# Altium PCB PCB1.PcbDoc
Units mm, origin at the board's own origin, x right, y up, seen from the top; angles counter-clockwise.
Board outline 85.47 x 55.88 mm, 2 copper layers (Top Layer, Bottom Layer); 30 components, 27 nets, 108 pads, 19 vias.
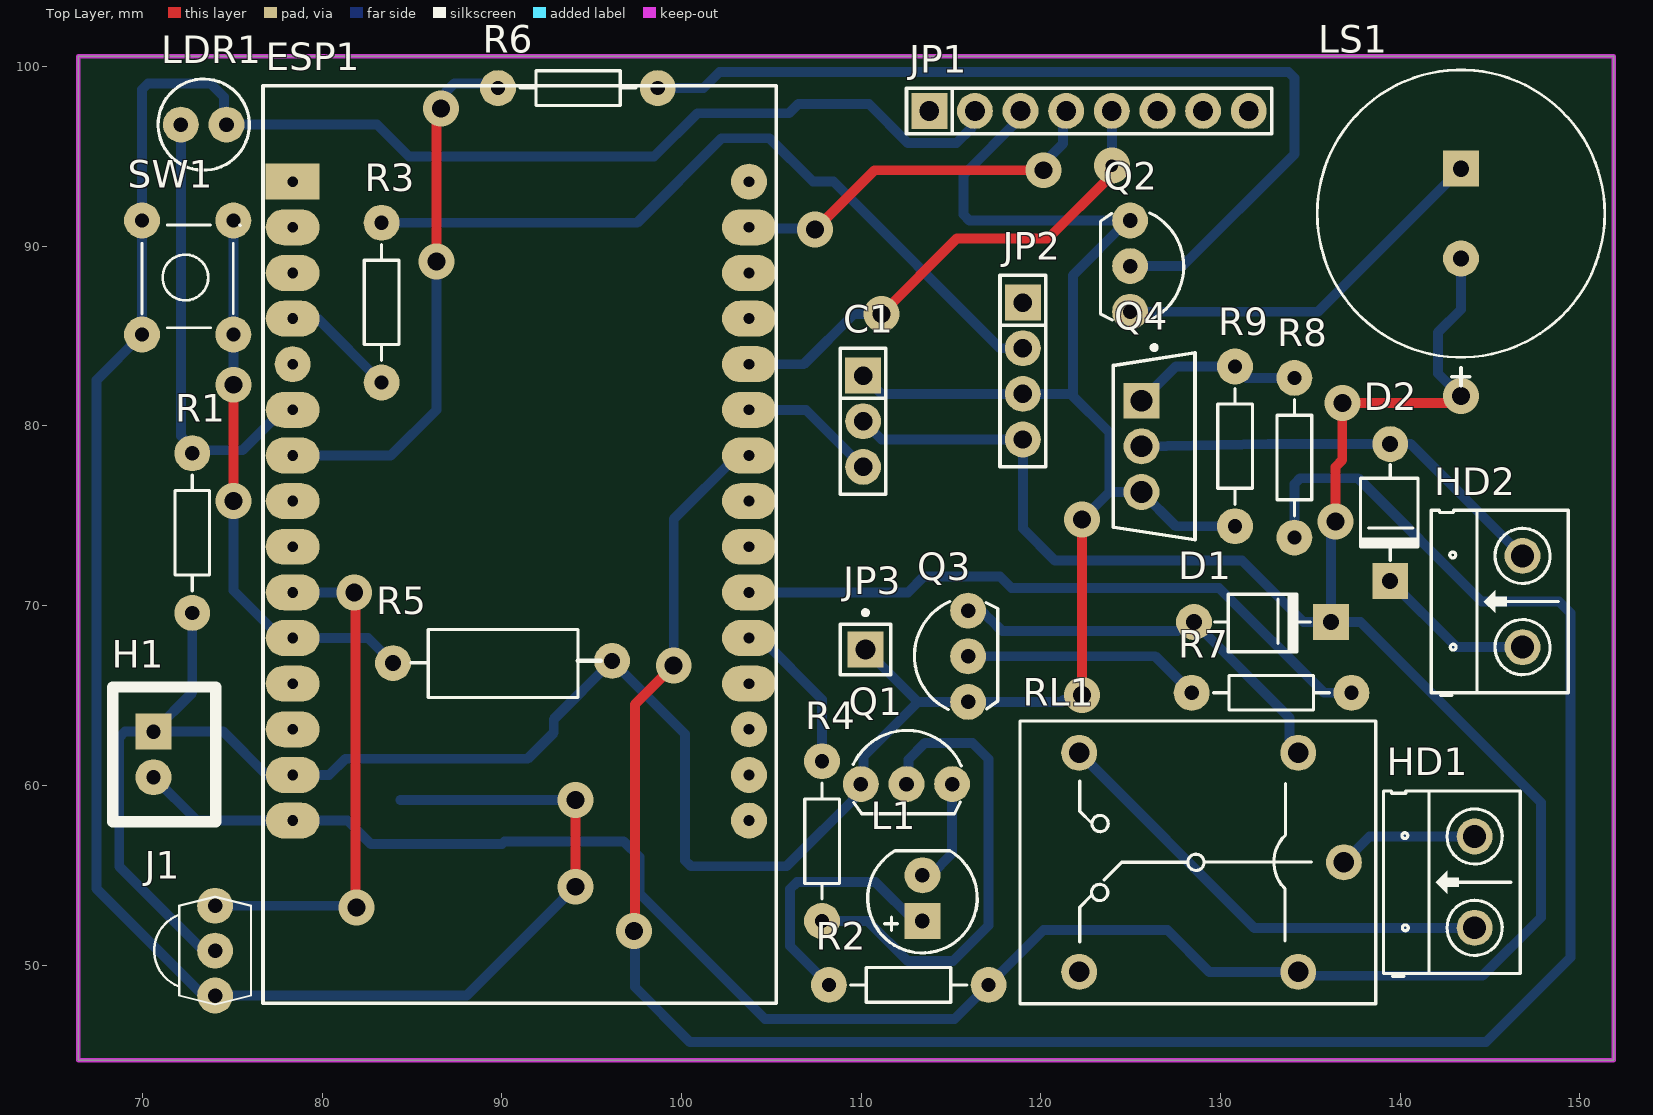
[diagram p0: Top Layer view]
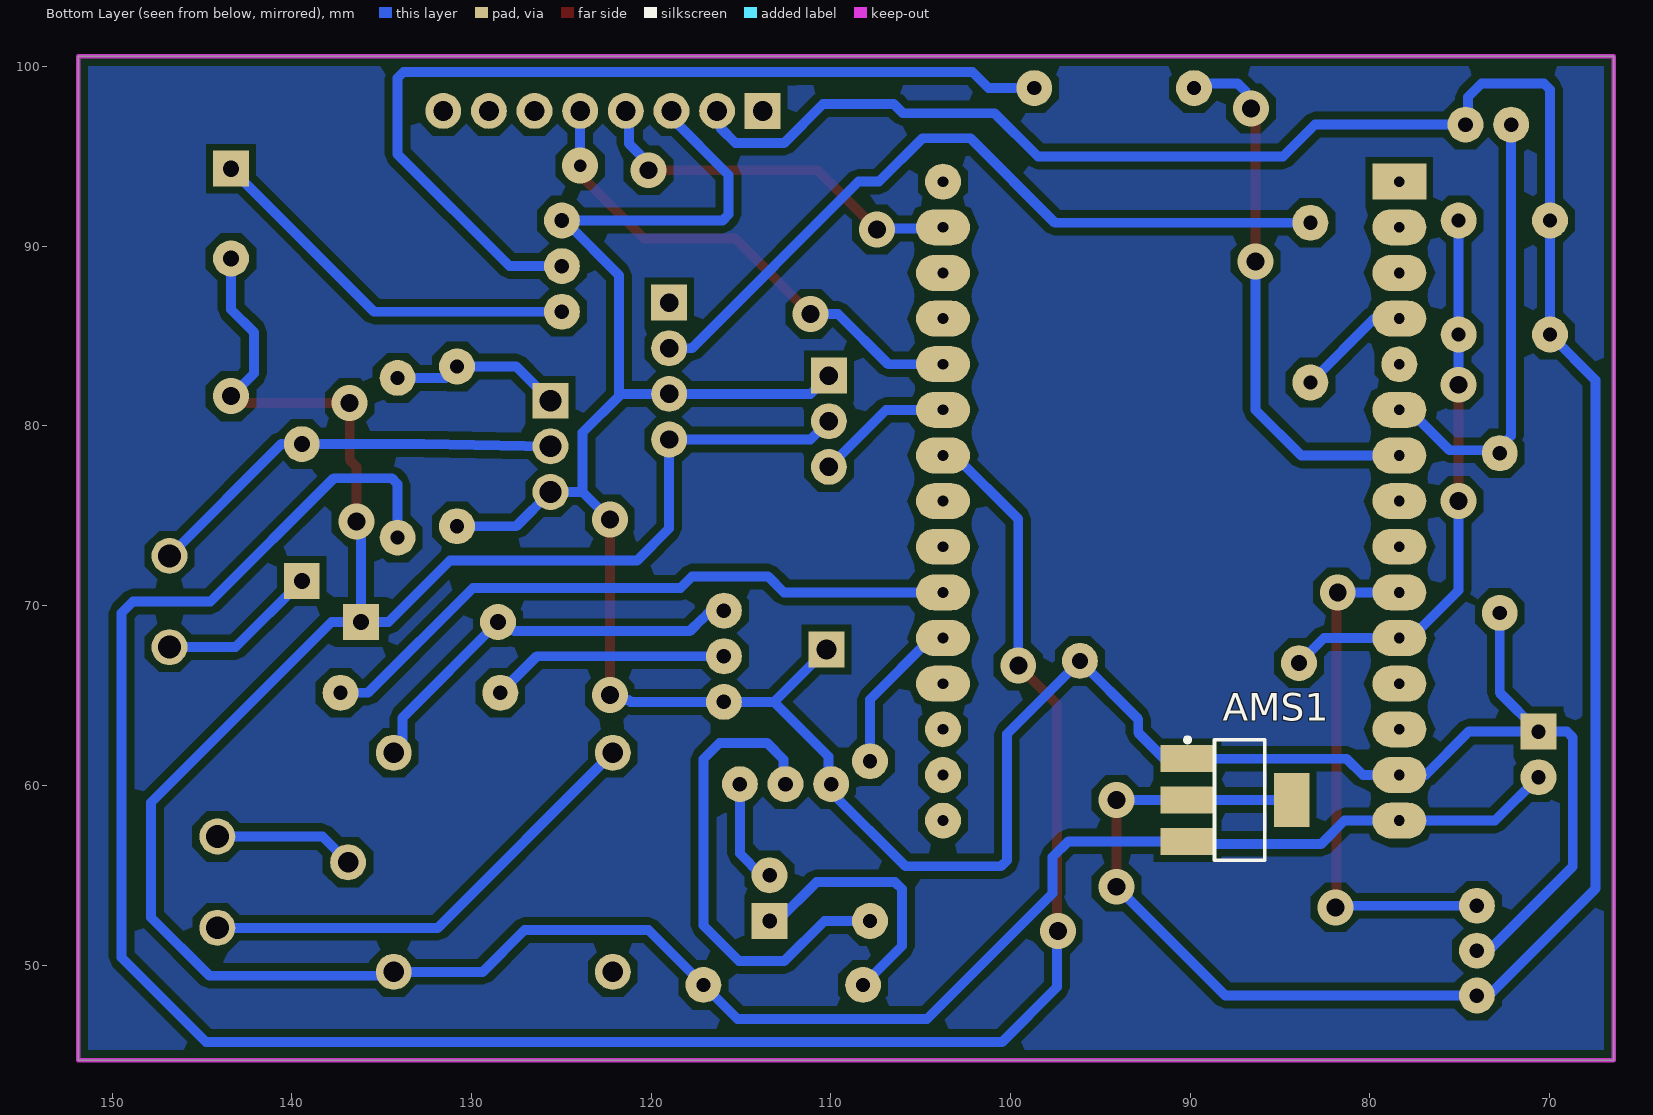
[diagram p1: Bottom Layer view, seen from below]
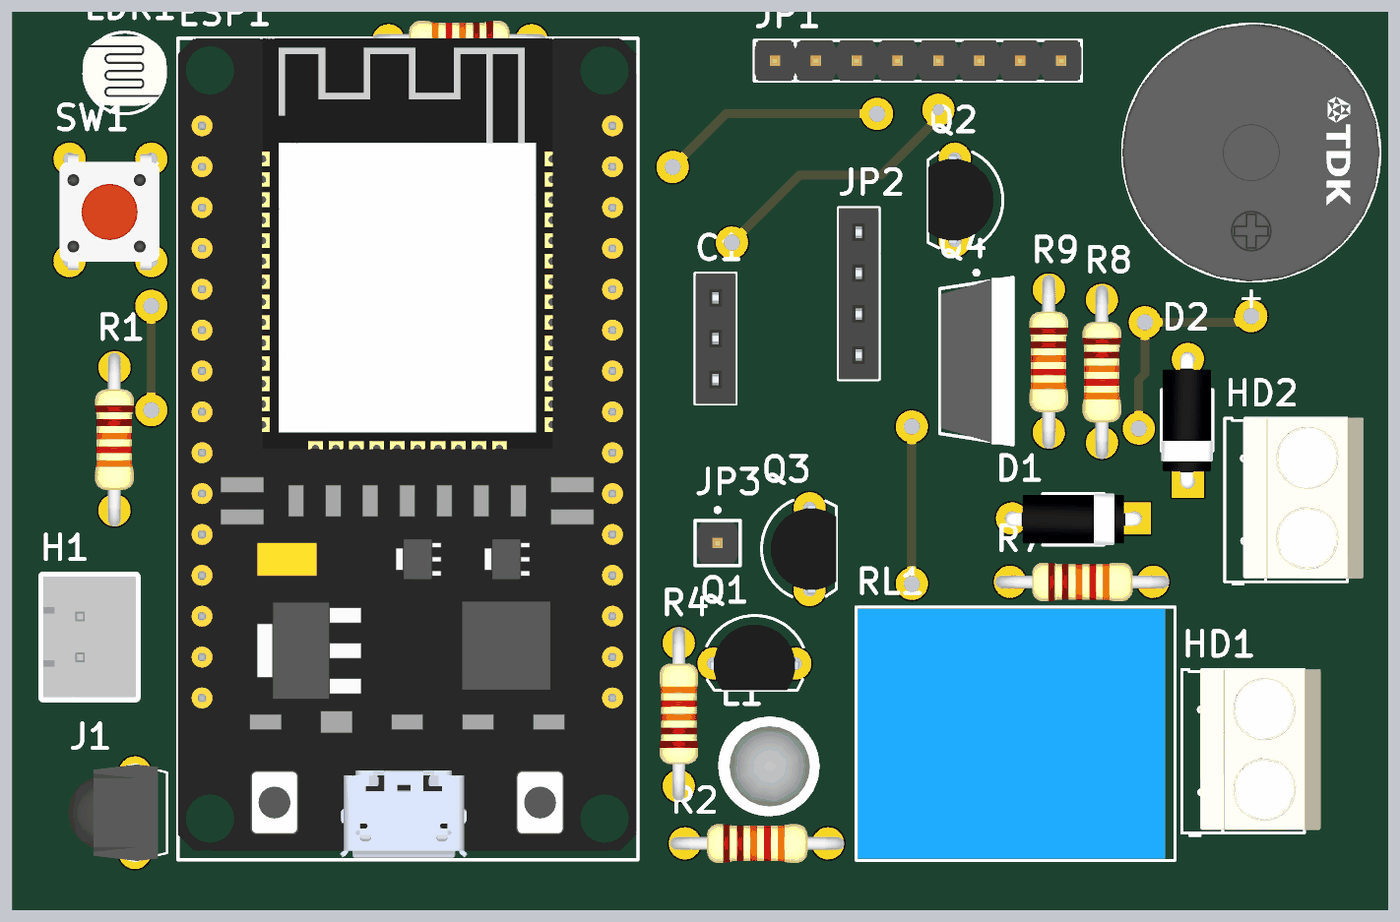
[diagram p2: 3D render of the assembled board from above, using the file's embedded part models]

## Layer stack, top to bottom
Top Solder: solder mask 0.0102, Solder Resist, Dk 3.5
Top Layer: signal copper 0.0356
Dielectric 1: dielectric 0.32, FR-4, Dk 4.8
Bottom Layer: signal copper 0.0356
Bottom Solder: solder mask 0.0102, Solder Resist, Dk 3.5

## Board outline
66.421,44.704 66.421,100.584 151.892,100.584 151.892,44.704

## Design rules (kind name [scope] priority, off if disabled: settings)
Clearance [All] p1: gap=0.4 ignorepadtopadclearanceinfootprint=FALSE
PolygonConnect [All] p1: connectstyle=Relief reliefconductorwidth=0.254 reliefentries=4 polygonreliefangle="90 Angle" airgapwidth=0.254
RoutingVias [All] p1: holewidth=0.711 width=1.27 viastyle="Through Hole" minholewidth=0.711 minwidth=1.27 maxholewidth=0.711 maxwidth=1.27
SolderMaskExpansion [All] p1: expansion=0.102 istentingtop=FALSE
SupplyNets "Schematic Supply Nets_2" [InNet('GND')] p1: voltage=0.000
SupplyNets "Schematic Supply Nets_1" [InNet('+12')] p2: voltage=0.000
SupplyNets "Schematic Supply Nets" [InNet('+5')] p3: voltage=0.000
Width [All] p1: maxlimit=0.6 minlimit=0.5 preferedwidth=0.55
30 further rules are at their usual default settings.

## Components (designator, comment, footprint, x,y, rotation, side; value= is the part's Value field where it differs from the comment)
AMS1 "AMS1117-3.3V" SOT223 87.249,59.182 r270 bottom value="AMS1117-3.3V SOT223"
C1 "JP3" JP3-C1T 110.109,82.804 r270 top
D1 "100v" "DIODE 1A" 127.254,69.088 r180 top
D2 "100v" "DIODE 1A" 139.446,80.264 r90 top
ESP1 "ESP32 DEVKIT" "ESP32 WROOM 32 KIT" 78.359,93.599 r0 top
H1 "Header 2P 2.54" XH2.54M-2 70.612,62.992 r270 top
HD1 "Header 2" HED2 144.145,52.07 r90 top
HD2 "Header 2" HED2 146.812,67.691 r90 top
J1 "IR 1838" "IR 1838" 74.068,50.799 r270 top
JP1 "JP 1x8 2.54" "JP 1x8 DT" 113.792,97.536 r0 top
JP2 "JP 1x4 2.54" "JP 1x4 CT" 118.999,86.868 r270 top
JP3 "JP 1x1 2.54" "JP 1x1 DT" 110.236,67.564 r0 top
L1 "LED 5mm" LED-5MM-WHITE 113.411,53.721 r90 top
LDR1 "LDR" CDS 72.136,96.774 r0 top
LS1 "SD1614T5-A1" FP-SD1614T5-A1-MFG 143.383,91.821 r270 top
Q1 "2N222" TO92-123 112.522,60.071 r0 top value=C1815
Q2 "2N222" TO92-123 124.968,88.9 r270 top value=C1815
Q3 "2N222" TO92-123 115.951,67.183 r90 top value=C1815
Q4 "IRLZ44NPbF" FP-PG-TO220-3-MFG 126.308,78.867 r0 top
R1 "10k" R1/4W 72.771,69.596 r90 top value="R1/4W - 1K"
R2 "47" R1/4W 117.094,48.895 r180 top value="R1/4W - 1K"
R3 "1k" R1/4W 83.312,82.423 r90 top value="R1/4W - 1K"
R4 "220" R1/4W 107.823,61.341 r270 top value="R1/4W - 1K"
R5 "10k" RES-1/2W 90.551,66.802 r180 top
R6 "220" R1/4W 89.789,98.806 r0 top value="R1/4W - 1K"
R7 "220" R1/4W 137.287,65.151 r180 top value="R1/4W - 1K"
R8 "220" R1/4W 134.112,73.787 r90 top value="R1/4W - 1K"
R9 "10k" R1/4W 130.81,74.422 r90 top value="R1/4W - 1K"
RL1 "Relay 10A/12V" "RELAY 5" 128.613,55.715 r180 top value="Relay SPDT, 10A, 12V"
SW1 "SW" SW4 69.977,85.09 r90 top value="Button chip 4 pin"

## Footprints (in the part's own frame and the unit in brackets; to place one, negate y for a bottom-side part, rotate by r counter-clockwise, add the part's x,y. Pads: shape width x height; smd on the part's side, far side on the other; paste and mask are expansions set on the pad)
CDS [mm] "QUANG TRO"
  round 2 hole 0.813: 1(0,0) 2(2.54,0)
  silkscreen extent -1.27,-2.54 3.81,2.54, body extent -1.33,-2.03 3.88,2.27, height 3.51
"DIODE 1A" [mm] "Diode 1A"
  round 2 hole 0.889: 1(-1.27,0)
  rect 2x2 hole 0.889: 2(-8.89,0)
  silkscreen extent -7.75,-1.55 -2.41,1.65, body extent -9.29,-1.55 -0.87,1.65, height 3.1
"ESP32 WROOM 32 KIT" [mm]
  rect 3x2 hole 0.6: 1(0,0)
  oval 3x2 hole 0.6: 2(0,-2.54) 3(0,-5.08) 4(0,-7.62) 6(0,-12.7) 7(0,-15.24) 8(0,-17.78) 9(0,-20.32) 10(0,-22.86) 11(0,-25.4) 12(0,-27.94) 13(0,-30.48) 14(0,-33.02) 15(0,-35.56) 19(25.4,-27.94) 20(25.4,-25.4) 21(25.4,-22.86) 22(25.4,-20.32) 23(25.4,-17.78) 24(25.4,-15.24) 25(25.4,-12.7) 26(25.4,-10.16) 27(25.4,-7.62) 28(25.4,-5.08) 29(25.4,-2.54)
  round 2 hole 0.6: 5(0,-10.16) 16(25.4,-35.56) 17(25.4,-33.02) 18(25.4,-30.48) 30(25.4,0)
  silkscreen extent -1.65,-45.72 26.92,5.33, body extent -1.65,-45.6 26.85,5.33, height 10.49
FP-PG-TO220-3-MFG [mm]
  rect 2x2 hole 1.2 paste-2539.97 mask+0: 1(-0.705,2.54)
  round 2 hole 1.2 paste-2539.97 mask+0: 2(-0.705,0) 3(-0.705,-2.54)
  silkscreen extent -2.27,-5.2 2.27,5.62, body extent -2.37,-5.55 2.37,5.55, height 0.25
FP-SD1614T5-A1-MFG [mm]
  rect 2x2 hole 0.9 paste-2539.97 mask+0: 1(-2.5,0)
  round 2 hole 0.9 paste-2539.97 mask+0: 2(2.5,0)
  silkscreen extent -8,-8 9.57,8, body extent -8.1,-8.1 8.1,8.1, height 0.25
HED2 [mm] "Header 2, 2 pin, hight 300mil, Pin to Pin 200, Colour Green"
  round 2 hole 1.27: 1(0,0) 2(5.08,0)
  silkscreen extent -2.69,-2.54 7.62,5.08, body extent -2.33,-3.56 7.67,3.94, height 10
"IR 1838" [mm]
  round 2 hole 0.813: GND(-0.001,-0.027) OUT(-2.501,-0.027) VCC(2.499,-0.027)
  silkscreen extent -3,-3.41 3,1.97, body extent -3,-4.19 3,1.4, height 12.79
JP3-C1T [mm] "3 row, straight, gold plating"
  rect 2x2 hole 1.02: 1(0,0)
  round 2 hole 1.02: 2(2.54,0) 3(5.08,0)
  silkscreen extent -1.52,-1.27 6.6,1.27, body extent -1.52,-1.25 6.6,1.25, height 8.51
"JP 1x1 DT" [mm] "1pins, 1 row, straight, gold plating"
  rect 2x2 hole 1.1: 1(0,0)
  silkscreen extent -1.4,-1.4 1.4,2.17, body extent -1.27,-1.27 1.27,1.27, height 8.54
"JP 1x4 CT" [mm]
  rect 2x2 hole 1.02: 1(0,0)
  round 2 hole 1.02: 2(2.54,0) 3(5.08,0) 4(7.62,0)
  silkscreen extent -1.52,-1.27 9.14,1.27, body extent -1.52,-1.25 9.14,1.25, height 8.51
"JP 1x8 DT" [mm] "8 pins, 1 row, straight, gold plating"
  rect 2x2 hole 1.1: 1(0,0)
  round 2 hole 1.1: 2(2.54,0) 3(5.08,0) 4(7.62,0) 5(10.16,0) 6(12.7,0) 7(15.24,0) 8(17.78,0)
  silkscreen extent -1.27,-1.27 19.05,1.27, body extent -1.27,-1.27 19.05,1.27, height 8.54
LED-5MM-WHITE [mm] "LED 2 PIN, 5 ly , Only colour, pin to pin 110mil"
  rect 2x2 hole 0.813: 1(-1.27,0)
  round 2 hole 0.813: 2(1.27,0)
  silkscreen extent -3.04,-3.05 2.64,3.04, body extent -3.15,-3.18 3.07,3.05, height 8.64
R1/4W [mm] "R 1/4W, 2 Pin, 350mil"
  round 2 hole 0.787: 1(0,0) 2(8.89,0)
  silkscreen extent 1.22,-0.97 7.67,0.97, body extent -1.01,-1.19 9.79,1.21, height 2.83
"RELAY 5" [mil] "Reley DPDT, 8 pin, 1A, W400mil, L800mil,H 300mil"
  round 78.74 hole 45: 1(-325,0) 2(255,240) 3(255,-240) 4(-225,-240) 5(-225,240)
  silkscreen extent -395,-310 385,310, body extent -371,-304 381,306, height 602
RES-1/2W [mil]
  round 78.74 hole 35: 1(-220,-5) 2(260,0)
  silkscreen extent -195,-74 221,75, body extent -230,-60 270,56, height 121
SOT223 [mm]
  rect 1.5x3 smd: 1(-2.3,-2.9) 2(0,-2.9) 3(2.3,-2.9)
  rect 3x2 smd: 4(0,2.9)
  silkscreen extent -3.47,-3.03 3.35,1.4, body extent -3.25,-3.56 3.25,3.4, height 1.68
SW4 [mm] "SW button 4pin, 250 x250 mil"
  round 2 hole 0.787: 1(0,0) 2(6.35,-5.08) 3(6.35,0) 4(0,-5.08)
  silkscreen extent 0.38,-5.46 6.1,0, body extent -0.9,-5.59 7,0.61, height 7
TO92-123 [mm] "TO-92"
  round 2 hole 0.813: 1(-2.54,0) 2(0,0) 3(2.54,0)
  silkscreen extent -2.96,-1.65 3.05,2.99, body extent -2.77,-1.67 2.77,2.41, height 6.22
XH2.54M-2 [mm]
  rect 2x2 hole 0.8: 1(0,0)
  round 2 hole 0.8: 2(2.54,0)
  silkscreen extent -2.48,-2.26 5.02,3.46, body extent -2.48,-2.26 5.02,3.48, height 6.91

## Part data
AMS1: library part "AMS1117 SMD", "Dán", Chung_Loai=Dán, Don_Vi=Con, Ma_Hang=MH000596
C1: "WR-PHD 2.54 mm Angled Socket Header", Manufacturer="W¨¹rth Elektronik eiSos GmbH", partNo=613003143121, ComponentLink1 Description=Manufacturer, ComponentLink1URL=http://www.we-online.com, ComponentLink2 Description=Datasheet, ComponentLink2URL=http://katalog.we-online.de/em/datasheet/6130xx143121.pdf, Created by="Karrer Zheng", Created Date="29 March 2013", NoPins=03
D1 D2: library part "Diode 1N4007", "Cắm", Chung_Loai=Cắm, Don_Vi=Con, Ma_Hang=MH001063, Ten_Linh_Kien="Diode 1N4007 1A (DIP)"
ESP1: library part "ESP32 WROOM 32 KIT"
H1: library part "Header 2P 2.54 Duc Thang", "Cắm", Chung_Loai=Cắm, Don_Vi=Con, Ma_Hang=MH001283, Ten_Linh_Kien="Header 2P XH2.54-2P Đực Thẳng"
HD1 HD2: library part Hed2, "Header 2 (Green)"
J1: "IR Receiver and Demodulator", Package=None, Availability=Unavailable, MP=TSOP1838, Price=None
JP1: library part "JP 1x8 2.54 Duc Thang", "Cắm", Chung_Loai=Cắm, Don_Vi=Con, Ma_Hang=MH000903, Ten_Linh_Kien="Jump Đơn Đực 2.54MM 1x40P Thẳng 11MM"
JP2: library part "JP 1x4 2.54 Cai Thang", "Cắm", Chung_Loai=Cắm, Don_Vi=Con, Ma_Hang=MH004006, Ten_Linh_Kien="Jump Đơn Cái 2.54MM 1x20P Thẳng"
JP3: library part "JP 1x1 2.54 Duc Cong", "Cắm", Chung_Loai=Cắm, Don_Vi=Con, Ma_Hang=MH000904, Ten_Linh_Kien="Jump Đơn Đực 2.54MM 1x40P Cong Đứng"
L1: library part "LED 5mm Trang", "Cắm", Chung_Loai=Cắm, Don_Vi=Con, Ma_Hang=MH008983, Ten_Linh_Kien="Led 5MM Trắng Đục (1000c)"
LDR1: "Quang Tro"
LS1: library part CMP-08413-000005-1, "BUZZER MAGNETIC 5V 80DB 2048HZ 1", Frequency=2.048kHz, Max Operating Temperature=85°C, Min Operating Temperature=-40°C, Operating Supply Current=80mA, Voltage Rating=5V, Mount=Panel, Sensing Method=Magnetic, Termination="PC Pins"
Q1 Q2 Q3: "NPN 600mW, ECB"
Q4: library part CMP-32901-000488-1, "MOSFET N-CH 55V 47A TO220AB", Case/Package=TO-220, Continuous Drain Current (ID)=47A, Drain to Source Breakdown Voltage=55V, Drain to Source Resistance=35mR, Gate to Source Voltage (Vgs)=16V, Input Capacitance=1.7nF, Max Operating Temperature=175°C, Max Power Dissipation=110W, Min Operating Temperature=-55°C, Threshold Voltage=2V, Drain to Source Voltage (Vdss)=55V, Element Configuration=Single, Halogen Free="Halogen Free", Height=0.6inch, Lead Free="Lead Free", Length=0.414inch, Max Dual Supply Voltage=55V, Mount="Through Hole", Number of Pins=3, Packaging=Rail/Tube, Power Dissipation=110W, Rds On Max=22mR, REACH SVHC="No SVHC", RoHS Compliant=Yes, Turn-Off Delay Time=26ns, Turn-On Delay Time=11ns, Width=0.185inch
R1 R2 R3 R4 R6 R7 R8 R9: library part R1/4W, "Resistor 1/4W"
R5: library part Res, "Res", Manufacturer="Generic Components", Class=Passive, Published=08/06/2000, Publisher="Altium Hobart Technology Centre", SubClass=R
RL1: library part "Relay 5", "Relay SPDT,10A - 12VDC 5 Pin"
SW1: library part SW4, "Switch button 4 pin"

## Via types
v1: diameter 2, hole 1, Top Layer to Bottom Layer, 18 vias
v2: diameter 2, hole 0.711, Top Layer to Bottom Layer, 1 vias

## Nets (pads, with @x,y where several pads share a name; then routed paths per layer and width w, separated by ;. In a path a pad name is that pad's centre, name@x,y a point inside that pad or via, vN(x,y) a via of type N, cw(c..) or ccw(c..) an arc to the next point about the centre after c; other vN are vias at no path point)
2: JP2.2 R3.2 | length 42.5
  Bottom Layer w0.55: R3.2 97.536,91.313 102.235,96.012 104.902,96.012 107.315,93.599 108.458,93.599 117.729,84.328 JP2.2
4: ESP1.20 R4.1 | length 8.9
  Bottom Layer w0.55: ESP1.20 104.409,68.199 107.823,64.785 R4.1
14: ESP1.11 R5.2 SW1.2 SW1.4 | length 31.2
  Top Layer w0.55: v1(75.057,75.819) v1(75.057,82.296)
  Bottom Layer w0.55: v1(75.057,75.819) 75.057,70.851 77.709,68.199 ESP1.11 82.55,68.199 R5.2 ; v1(75.057,82.296) SW1.4 SW1.2
16: ESP1.21 R7.1 | length 36.6
  Bottom Layer w0.55: ESP1.21 112.598,70.739 113.487,71.628 117.729,71.628 118.364,70.993 129.921,70.993 135.763,65.151 R7.1
18: ESP1.24 R8.1 | length 128.7
  Top Layer w0.55: v1(97.368,51.902) 97.409,51.943 97.409,64.516 v1(99.568,66.675)
  Bottom Layer w0.55: v1(97.368,51.902) 97.409,51.86 97.409,48.768 100.457,45.72 144.78,45.72 149.479,50.419 149.479,69.596 148.844,70.231 144.526,70.231 137.668,77.089 134.434,77.089 134.112,76.767 R8.1 ; v1(99.568,66.675) 99.568,74.818 103.109,78.359 ESP1.24
19: C1.3 ESP1.25 | length 7.7
  Bottom Layer w0.55: ESP1.25 106.934,80.899 C1.3
21: ESP1.26 JP1.5 | length 28.1
  Top Layer w0.55: v1(111.125,86.233) 115.322,90.43 120.402,90.43 123.814,93.842 123.814,94.35 v2(123.952,94.488)
  Bottom Layer w0.55: ESP1.26 106.804,83.439 109.598,86.233 v1(111.125,86.233) ; v2(123.952,94.488) JP1.5
22: ESP1.29 JP1.4 | length 21.6
  Top Layer w0.55: v1(107.442,90.932) 110.744,94.234 v1(120.142,94.234)
  Bottom Layer w0.55: ESP1.29 103.822,90.995 107.379,90.995 v1(107.442,90.932) ; v1(120.142,94.234) 120.142,94.626 121.227,95.711 121.227,97.351 JP1.4
27: ESP1.10 J1.OUT | length 28.9
  Top Layer w0.55: v1(81.788,70.739) 81.852,70.675 81.852,53.276 v1(81.915,53.213)
  Bottom Layer w0.55: J1.OUT 81.828,53.3 v1(81.915,53.213) ; ESP1.10 v1(81.788,70.739)
32: ESP1.6 LDR1.1 R1.2 | length 24.9
  Bottom Layer w0.55: LDR1.1 72.136,79.453 72.771,78.818 R1.2 ; R1.2@72.937,78.652 75.558,78.652 77.805,80.899 ESP1.6
33: ESP1.7 R6.1 | length 30.2
  Top Layer w0.55: v1(86.36,89.154) 86.36,97.409 v1(86.618,97.667)
  Bottom Layer w0.55: ESP1.7 83.82,78.359 86.36,80.899 v1(86.36,89.154) ; v1(86.618,97.667) 86.896,97.945 86.896,98.605 87.35,99.06 89.535,99.06 R6.1
34: ESP1.4 R3.1 | length 6.4
  Bottom Layer w0.55: ESP1.4 79.756,85.979 R3.1
+5: AMS1.3 C1.2 D1.2 ESP1.15 H1.2 JP2.4 LS1.2 R2.1 RL1.5 | length 172.3
  Top Layer w0.55: v1(136.398,74.676) 136.398,77.719 136.779,78.1 v1(136.779,81.28) 142.807,81.28 143.188,81.661 v1(143.383,81.661)
  Bottom Layer w0.55: H1.2 73.025,58.039 ESP1.15 81.407,58.039 82.702,56.744 90.011,56.744 AMS1.3 96.788,56.882 97.663,56.007 97.663,53.975 104.648,46.99 115.189,46.99 R2.1 120.142,51.943 127.051,51.943 129.375,49.619 RL1.5 134.544,49.403 144.58,49.403 147.828,52.651 147.828,59.055 137.795,69.088 D1.2 ; C1.2 111.125,79.248 JP2.4 118.999,74.295 120.777,72.517 131.191,72.517 134.62,69.088 D1.2 ; v1(136.398,74.676) 136.398,74.481 136.144,74.227 D1.2 ; v1(143.383,81.661) 142.113,82.931 142.113,85.217 143.383,86.487 LS1.2
+12: D2.2 HD2.1 | length 8.9
  Bottom Layer w0.55: D2.2 143.129,67.691 HD2.1
GND: AMS1.1 C1.1 ESP1.14 H1.1 J1.GND JP1.3 JP2.3 JP3.1 Q1.1 Q2.1 Q3.1 Q4.3 R1.1 R5.1 R9.1 | length 163.1
  Top Layer w0.55: v1(122.301,65.024) v1(122.301,74.803)
  Bottom Layer w0.55: R1.1 72.771,65.151 H1.1 ; J1.GND 73.381,50.8 68.707,55.474 68.707,62.67 69.029,62.992 H1.1 ; C1.1 111.125,81.788 JP2.3 121.666,81.788 ; JP3.1 113.157,64.643 ; JP1.3 118.872,97.155 115.697,93.98 115.697,91.762 116.019,91.44 Q2.1@124.587,91.44 ; v1(122.301,65.024) 122.024,64.747 121.25,64.747 121.147,64.643 Q3.1 113.157,64.643 ; v1(122.301,74.803) 123.825,76.327 ; Q2.1 124.746,91.44 124.746,91.345 121.793,88.392 121.793,81.788 121.666,81.788 ; R9.1 127.508,74.422 Q4.3 123.825,76.327 ; H1.1 74.498,62.992 76.911,60.579 ESP1.14 80.391,60.579 81.294,61.482 AMS1.1 91.44,61.482 92.888,62.93 92.888,63.678 R5.1 100.203,62.865 100.203,55.821 100.525,55.499 105.842,55.499 109.982,59.639 Q1.1 110.125,60.214 110.125,61.611 113.157,64.643 ; 121.666,81.788 123.825,79.629 123.825,76.327
NetD1_1: D1.1 Q3.3 RL1.4 | length 22.9
  Bottom Layer w0.55: Q3.3 116.688,69.723 117.149,69.262 117.174,69.262 117.856,68.58 127.615,68.58 128.123,69.088 D1.1 133.85,63.762 133.85,62.289 RL1.4
NetD2_1: D2.1 HD2.2 Q4.2 | length 23.8
  Bottom Layer w0.55: Q4.2 132.664,78.994 D2.1 140.589,78.994 HD2.2
NetHD1_1: HD1.1 RL1.3 | length 26
  Bottom Layer w0.55: RL1.3 131.877,52.07 HD1.1
NetHD1_2: HD1.2 RL1.1 | length 7.9
  Bottom Layer w0.55: RL1.1 138.303,57.15 HD1.2
NetL1_1: L1.1 R2.2 | length 14.6
  Bottom Layer w0.55: R2.2 106.045,51.054 106.045,54.229 106.426,54.61 110.807,54.61 112.966,52.451 L1.1
NetL1_2: L1.2 Q1.3 | length 6
  Bottom Layer w0.55: L1.2 113.855,54.991 115.062,56.197 Q1.3
NetLS1_1: LS1.1 Q2.3 | length 21.7
  Bottom Layer w0.55: Q2.3 135.422,86.36 LS1.1
NetQ1_2: Q1.2 R4.2 | length 26.9
  Bottom Layer w0.55: R4.2 110.361,52.451 112.591,50.22 115.117,50.22 117.094,52.197 117.094,61.468 116.205,62.357 113.538,62.357 112.627,61.446 112.627,60.176 Q1.2
NetQ2_2: Q2.2 R6.2 | length 51.9
  Bottom Layer w0.55: R6.2 101.219,98.806 102.108,99.695 133.79,99.695 134.112,99.373 134.112,95.123 127.889,88.9 Q2.2
NetQ3_2: Q3.2 R7.2 | length 13.3
  Bottom Layer w0.55: Q3.2 126.365,67.183 R7.2
NetQ4_1: Q4.1 R8.2 R9.2 | length 9.6
  Bottom Layer w0.55: Q4.1 127.508,83.312 R9.2 131.445,82.677 R8.2
Vo: AMS1.2 AMS1.4 J1.VCC JP1.2 LDR1.2 SW1.1 SW1.3 | length 144
  Top Layer w0.55: v1(94.107,54.356) v1(94.107,59.182)
  Bottom Layer w0.55: AMS1.4 AMS1.2 v1(94.107,59.182) ; v1(94.107,54.356) 88.051,48.3 J1.VCC 73.381,48.3 67.437,54.244 67.437,82.55 SW1.1 SW1.3 69.977,98.738 70.299,99.06 73.787,99.06 74.535,98.312 74.535,96.915 LDR1.2 83.058,96.774 84.836,94.996 98.478,94.996 100.891,97.409 105.991,97.409 106.499,97.917 110.436,97.917 112.595,95.758 115.316,95.758 116.131,96.573 116.131,97.335 JP1.2
pads on no net: ESP1.1 ESP1.2 ESP1.3 ESP1.5 ESP1.8 ESP1.9 ESP1.12 ESP1.13 ESP1.16 ESP1.17 ESP1.18 ESP1.19 ESP1.22 ESP1.23 ESP1.27 ESP1.28 ESP1.30 JP1.1 JP1.6 JP1.7 JP1.8 JP2.1 RL1.2

## Polygon pours and split planes (outlines as drawn)
no net on Bottom Layer "NONET_L02_P000" (solid, pour order 0): 151.892,100.584 151.892,44.831 151.765,44.704 66.421,44.704 66.421,100.584

## Keep-outs
Keep-Out Layer:
  lines w0.254: 66.421,44.704 66.421,100.584 67.437,100.584 151.892,100.584 151.892,44.704 66.421,44.704